# Allegro board avrusb500_1.brd
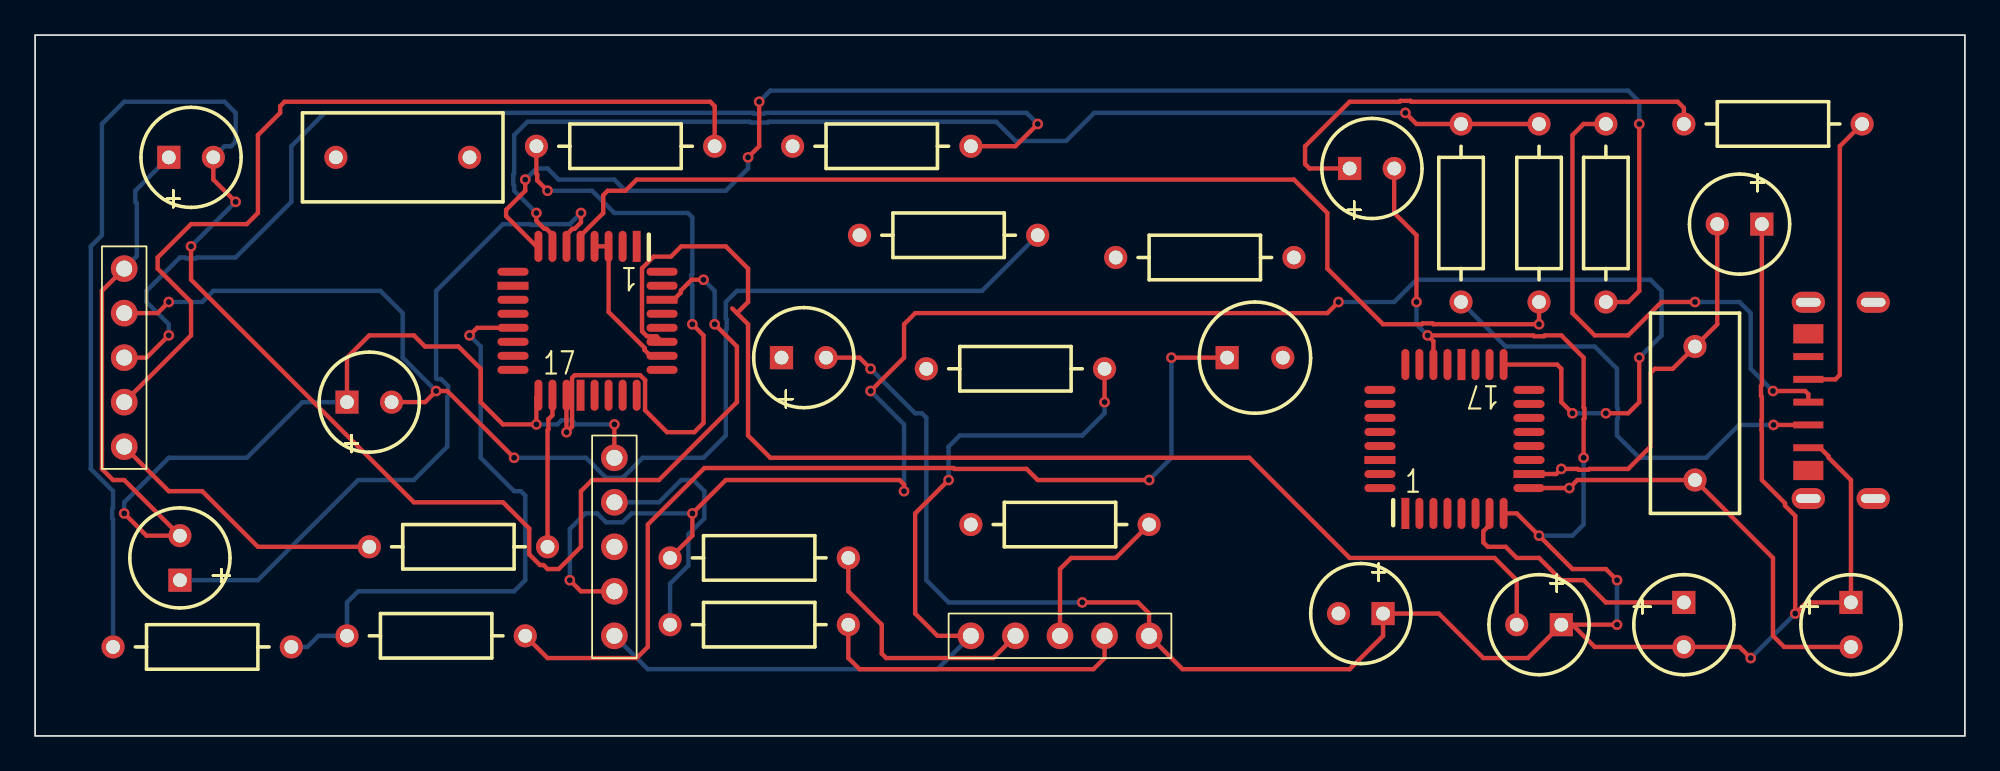
[diagram p0: board, top side]
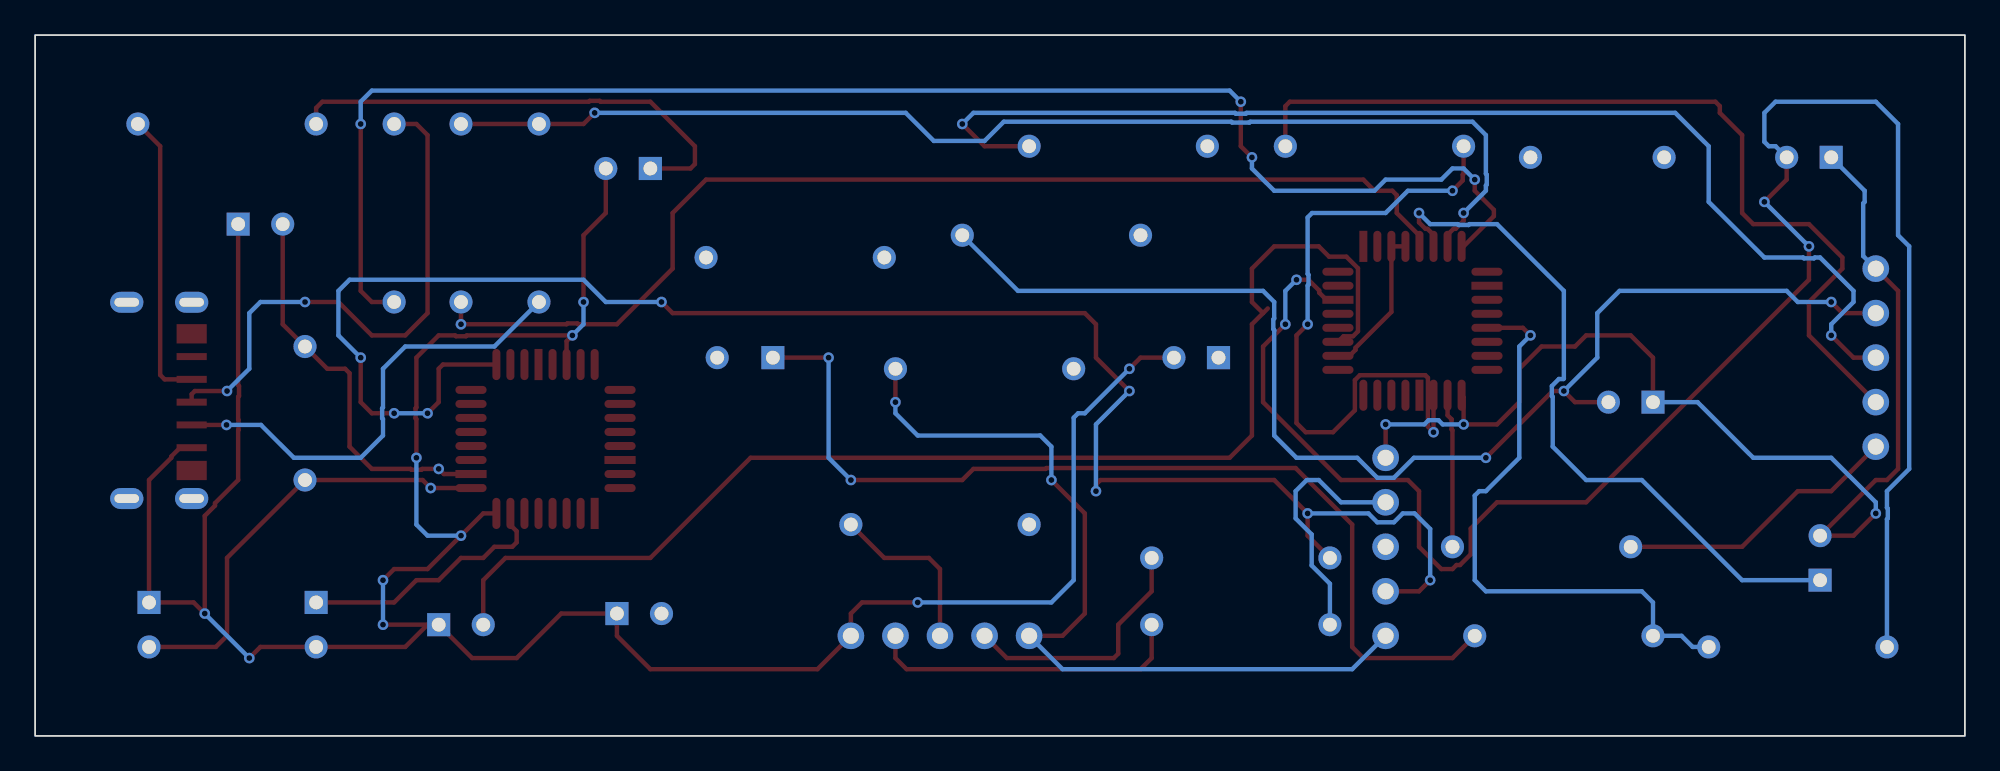
[diagram p1: board, bottom side, seen from below]

Outline 110 x 40 mm; copper layers: TOP, BOTTOM. Coordinates in mm from the lower left corner of the outline.
Outline path: rectangle 0,0 110,40

## Placement (name value [footprint] x y rotation side)
C1  47nF  [CPCYL1D225LS100031]  7.62 33.02 0 top
C2  27pF  [CPCYL1D225LS100031]  76.83 6.99 180 top
C3  27pF  [CPCYL1D225LS100031]  87 6.35 180 top
C4  47nF  [CPCYL1D225LS100031]  8.26 8.89 90 top
C5  100nF  [CPCYL1D225LS100031]  93.98 7.62 270 top
C6  1uF  [CPCYL1D225LS100031]  42.55 21.59 0 top
C7  100nF  [CPCYL1D225LS100031]  103.5 7.62 270 top
C8  100nF  [CPCYL1D225LS100031]  98.42 29.21 180 top
C9  100nF  [CPCYL1D225LS100031]  74.93 32.38 0 top
C10  22nF  [CPCYL1D225LS100031]  17.78 19.05 0 top
D1  LED  [CYLD250LS125031]  67.94 21.59 0 top
IC1  ATmega8  [QUAD80M32WG900]  78.11 12.7 0 top
J1  bbpg_Bitbang  [JUMPER5]  5.08 16.51 90 top
J2  USBA  [MY_USB]  104.78 19.05 90 top
J3  avrusb500_out  [JUMPER5]  53.34 5.71 0 top
J4  firmware_in  [JUMPER5]  33.02 5.71 90 top
R1  470  [AX400X100031]  4.45 5.08 0 top
R2  220  [AX400X100031]  46.99 28.57 0 top
R3  220  [AX400X100031]  43.18 33.66 0 top
R4  220  [AX400X100031]  28.57 33.66 0 top
R5  27  [AX400X100031]  89.53 34.92 270 top
R6  27  [AX400X100031]  81.28 24.77 90 top
R7  1.5k  [AX400X100031]  85.72 34.92 270 top
R8  2.2  [AX400X100031]  104.14 34.92 180 top
R9  10k  [AX400X100031]  61.59 27.3 0 top
R10  470  [AX400X100031]  27.94 5.71 180 top
R11  1k  [AX400X100031]  36.2 6.35 0 top
R12  220  [AX400X100031]  53.34 12.06 0 top
R13  1k  [AX400X100031]  36.2 10.16 0 top
R14  220  [AX400X100031]  29.21 10.79 180 top
R15  220  [AX400X100031]  50.8 20.95 0 top
U1  FT232BM  [QUAD80M32WG900]  34.29 27.94 180 top
Y1  3.6864Mhz  [RAD450X200LS300031]  94.61 22.23 270 top
Y2  6Mhz  [RAD450X200LS300031]  17.14 33.02 0 top

## Library data of the parts
C1-C5 C7-C10 = CAPACITOR NON-POL: alternate symbols: (SMDCAP)
C6 = CAPACITOR POL: alternate symbols: (SMDCAP)
D1 = LED
IC1 = ATmega8-DIL28_2
J1 J3 J4 = CON5: User Part Number: ***
J2 = CON4_7
R1-R15 = R: alternate symbols: (SMDRES)
U1 = FT232BM_2: alternate symbols: (JEDECMS026)
Y1 Y2 = ZTA

## Footprints (pads in the part's own frame, mm; a bottom-side part is the same pattern mirrored in y, then rotated)
AX400X100031
  round 1.321 hole 0.787: 1(0,0) 2(10.16,0)
CPCYL1D225LS100031
  rect 1.321x1.321 hole 0.787: 1(0,0)
  round 1.321 hole 0.787: 2(2.54,0)
CYLD250LS125031
  rect 1.321x1.321 hole 0.787: 1(0,0)
  round 1.321 hole 0.787: 2(3.175,0)
JUMPER5
  round 1.524 hole 0.914: 1(0,0) 2(2.54,0) 3(5.08,0) 4(7.62,0) 5(10.16,0)
MY_USB
  oval 1.2x1.9 hole 0.5x1.4: (-5.5,3.7) (-5.5,0) (5.7,3.7) (5.7,0)
  rect 1.1x1.72 smd: (-3.9,3.7) (3.9,3.7)
  rect 0.4x1.72 smd: 1(-2.6,3.7) 2(-1.3,3.7) 3(0,3.7) 4(1.3,3.7) 5(2.6,3.7)
QUAD80M32WG900
  rect 0.457x1.778 smd: 1(0,0) 20(3.2,8.496)
  oval 0.457x1.778 smd: 2(0.8,0) 3(1.6,0) 4(2.4,0) 5(3.2,0) 6(4,0) 7(4.801,0) 8(5.601,0) 17(5.601,8.496) 18(4.801,8.496) 19(4,8.496) 21(2.4,8.496) 22(1.6,8.496) 23(0.8,8.496) 24(0,8.496)
  oval 1.778x0.457 smd: 9(7.048,1.448) 11(7.048,3.048) 12(7.048,3.848) 13(7.048,4.648) 14(7.048,5.448) 15(7.048,6.248) 16(7.048,7.048) 25(-1.448,7.048) 26(-1.448,6.248) 27(-1.448,5.448) 28(-1.448,4.648) 29(-1.448,3.848) 31(-1.448,2.248) 32(-1.448,1.448)
  rect 1.778x0.457 smd: 10(7.048,2.248) 30(-1.448,3.048)
RAD450X200LS300031
  round 1.321 hole 0.787: 1(0,0) 2(7.62,0)

## Nets
+5V: J2.4 R8.1
GND: C1.1 C2.1 C3.1 C4.2 C5.2 C6.2 C7.1 C8.1 C9.2 C10.1 IC1.8(GND) IC1.22(AGND) J1.5 J2.1 J3.5 J4.5 U1.9(GND) U1.14(PWRCTL) U1.17(GND1) U1.29(AGND) U1.31(TEST)
VCC: C5.1 C6.1 C9.1 IC1.7(VCC) IC1.20(AVCC) R1.2 R8.2 R9.1 R10.2 U1.3(VCC) U1.4(RESET#) U1.13(VCC-IO) U1.26(VCC1)
BMISO: J1.3 R3.2
BMOSI: J1.2 R4.2
BRESET: J1.1 R14.2
BSCK: C10.2 J1.4 R2.2
D+: J2.2 R6.1
D-: J2.3 R5.1
F_MISO: IC1.18((MISO) PB4) J4.3 R12.1
F_MOSI: IC1.17((OC2/MOSI) PB3) J4.2 R13.1
F_SCK: IC1.19((SCK) PB5) J4.4 R11.1
MISO: J3.3 R12.2
MOSI: J3.2 R13.2
RESET: IC1.1(PC6 (R\E\S\E\T\)) J3.1 J4.1 R9.2 R15.2
RXD: IC1.2(PD0 (RXD)) U1.24(RXD)
SCK: J3.4 R11.2
TXD: IC1.3(PD1 (TXD)) U1.25(TXD)
N02483: R6.2 R7.1 U1.7(USBDP)
N02615: R5.2 U1.8(USBDM)
N03527: C4.1 U1.6(3V3OUT)
N06839: R2.1 U1.21(DTR#)
N06967: R3.1 U1.20(DSR#)
N07033: R4.1 U1.19(DCD#)
N07247: R14.1 U1.18(RI#)
N11951: R7.2 U1.5(RSTOUT#)
N15182: C7.2 IC1.9(PB6 (XT1/TOSC1)) Y1.2
N15289: C8.2 IC1.10(PB7 (XT2/TOSC2)) Y1.1
N19734: D1.2(CATHODE) IC1.23((ADC0) PC0)
N20572: D1.1(ANODE) R10.1
N22544: IC1.16((SS/OC1B) PB2) R15.1
N41098: C3.2 U1.27(XTIN) Y2.2
N41106: C2.2 U1.28(XTOUT) Y2.1
N49165: C1.2 R1.1 U1.30(AVCC)

Pads without a net: IC1 4 5 6 11 12 13 14 15 21 24 25 26 27 28 29 30 31 32; J2 5; U1 1 2 10 11 12 15 16 22 23 32

## Via types
v1: diameter 0.61, hole 0.33, TOP to BOTTOM, 51 vias

## Routing (per net, layer and track width the routed paths; a pad name or vN(x,y) marks a point on that pad's centre or on a via; arc(x,y) is an arc through that point)
+5V: length 16.7
  TOP w0.253: R8.1 102.87,33.66 102.87,20.6 102.62,20.35 J2.4
GND: length 228.5
  TOP w0.253: U1.17 28.57,19.33 v1(28.57,17.78) 26.67,17.78 25.4,19.05 25.4,20.95 24.13,22.23 22.23,22.23 21.59,22.86 19.05,22.86 17.78,21.59 C10.1 ; 87.63,6.35 88.9,5.08 C5.2 97.16,5.08 v1(97.79,4.45) ; 87.63,6.35 v1(90.17,6.35) ; 87.63,6.35 C3.1 85.09,4.45 82.55,4.45 80.01,6.99 C2.1 76.83,5.71 74.93,3.81 65.41,3.81 J3.5 63.5,6.99 62.87,7.62 v1(59.69,7.62) ; IC1.22 79.7,22.53 v1(79.38,22.86) 85.39,22.86 85.44,22.81 86.01,22.81 86.06,22.86 87,22.86 88.27,21.59 88.27,18.75 88.31,18.7 88.31,18.13 88.27,18.08 v1(88.27,15.88) ; C8.1 98.42,20.02 98.38,19.97 98.38,19.4 98.42,19.35 98.42,18.05 98.41,18.03 98.41,17.47 98.42,17.45 98.42,14.61 99.75,13.28 99.75,13.14 100.33,12.56 v1(100.33,6.99) 100.97,7.62 C7.1 ; v1(78.74,24.77) 78.74,28.57 77.47,29.84 C9.2 ; C6.2 46.99,21.59 v1(47.62,20.95) ; J4.5 v1(33.02,17.78) ; J1.5 3.81,25.4 3.81,15.24 4.45,14.61 5.08,14.61 C4.2 6.35,11.43 v1(5.08,12.7) ; IC1.8 84.45,12.7 v1(85.72,11.43) 87.63,9.53 89.53,9.53 v1(90.17,8.89)
  TOP w0.254: C7.1 103.5,14.61 102.23,15.88 102.23,15.95 101.74,16.45 J2.1
  BOTTOM w0.253: v1(78.74,24.77) 78.74,23.5 v1(79.38,22.86) ; v1(97.79,4.45) v1(100.33,6.99) ; v1(59.69,7.62) 52.07,7.62 50.8,8.89 50.8,18.16 50.55,18.41 50.16,18.41 v1(47.62,20.95) ; v1(28.57,17.78) 29.77,17.78 30.01,18.02 30.57,18.02 30.81,17.78 v1(33.02,17.78) ; C1.1 5.71,31.11 5.71,30.48 5.8,30.4 5.8,27.39 J1.5 ; v1(90.17,8.89) v1(90.17,6.35) ; v1(85.72,11.43) 87.63,11.43 88.27,12.06 v1(88.27,15.88) ; C10.1 15.24,19.05 12.06,15.88 7.62,15.88 5.08,13.34 v1(5.08,12.7)
VCC: length 84.9
  TOP w0.253: R8.2 93.98,35.84 93.62,36.2 78.44,36.2 78.39,36.24 77.82,36.24 77.77,36.2 74.93,36.2 72.39,33.66 72.39,32.64 72.64,32.38 C9.1 ; U1.26 35.08,21.69 34.74,22.03 34.74,22.15 32.69,24.2 U1.3 U1.4 ; IC1.7 82.91,12.04 82.55,11.68 82.55,11.05 82.8,10.79 83.82,10.79 84.45,10.16 85.72,10.16 87,8.89 88.27,8.89 89.53,7.62 C5.1 ; U1.13 25.2,23.29 v1(24.77,22.86)
  BOTTOM w0.253: R1.2 15.52,5.08 16.15,5.71 R10.2 17.78,7.62 18.41,8.26 27.3,8.26 27.94,8.89 27.94,13.72 27.69,13.97 27.3,13.97 25.4,15.88 25.4,22.23 v1(24.77,22.86)
BMISO: length 67.7
  TOP w0.253: v1(7.62,22.86) 6.35,21.59 J1.3 ; R3.2 55.88,33.66 v1(57.15,34.92)
  BOTTOM w0.253: v1(7.62,22.86) 7.62,23.5 6.35,24.77 6.35,25.4 8.26,27.3 8.56,27.3 8.61,27.26 9.17,27.26 9.22,27.3 11.43,27.3 14.61,30.48 14.61,33.66 16.51,35.56 40.94,35.56 40.99,35.51 41.56,35.51 41.61,35.56 56.52,35.56 v1(57.15,34.92)
BMOSI: length 51.3
  TOP w0.253: J1.2 8.89,22.86 8.89,24.77 6.99,26.67 6.99,27.3 8.89,29.21 12.06,29.21 12.7,29.84 12.7,34.29 13.97,35.56 13.97,35.94 14.22,36.2 38.48,36.2 38.73,35.94 R4.2
BRESET: length 16.3
  TOP w0.253: J1.1 7.62,13.97 9.53,13.97 12.7,10.79 R14.2
BSCK: length 71.5
  TOP w0.253: v1(7.62,24.77) 6.99,24.13 J1.4 ; v1(27.3,15.88) 23.5,19.68 v1(22.86,19.68) 22.23,19.05 C10.2
  BOTTOM w0.253: R2.2 53.98,25.4 40.01,25.4 39.37,24.77 39.37,23.83 39.42,23.78 39.42,23.21 39.37,23.16 39.37,17.14 38.1,15.88 34.63,15.88 33.49,14.73 32.55,14.73 31.41,15.88 v1(27.3,15.88) ; v1(7.62,24.77) 9.53,24.77 10.16,25.4 19.68,25.4 20.95,24.13 20.95,21.59 v1(22.86,19.68)
D+: length 26.5
  TOP w0.253: J2.2 v1(99.09,17.75)
  BOTTOM w0.253: R6.1 83.82,22.23 88.9,22.23 90.17,20.95 90.17,18.75 90.22,18.7 90.22,18.13 90.17,18.08 90.17,17.14 91.44,15.88 95.25,15.88 97.12,17.75 v1(99.09,17.75)
D-: length 31.6
  TOP w0.253: R5.1 88.27,34.92 87.63,34.29 87.63,24.13 88.9,22.86 90.81,22.86 92.71,24.77 v1(94.61,24.77) ; J2.3 101.08,19.5 100.89,19.68 v1(99.06,19.68)
  BOTTOM w0.253: v1(94.61,24.77) 97.16,24.77 97.79,24.13 97.79,20.95 v1(99.06,19.68)
F_MOSI: length 102.6
  TOP w0.253: v1(91.44,21.59) 91.44,19.05 90.81,18.41 v1(89.53,18.41) ; v1(47.62,19.68) 49.53,21.59 49.53,23.5 50.16,24.13 73.66,24.13 v1(74.3,24.77) ; v1(30.48,8.89) 31.11,8.26 33.02,8.26 ; IC1.17 86.75,21.2 87,20.95 87,19.05 v1(87.63,18.41) ; R13.1 37.47,11.43 v1(37.47,12.7) 39.37,14.61 49.28,14.61 49.53,14.35 v1(49.53,13.97)
  BOTTOM w0.253: v1(47.62,19.68) 49.53,17.78 v1(49.53,13.97) ; v1(74.3,24.77) 77.47,24.77 78.74,26.04 92.08,26.04 92.71,25.4 92.71,22.86 v1(91.44,21.59) ; v1(87.63,18.41) v1(89.53,18.41) ; v1(37.47,12.7) 34,12.7 33.49,12.19 32.55,12.19 32.04,12.7 31.37,12.7 30.48,11.81 v1(30.48,8.89)
F_SCK: length 14.3
  BOTTOM w0.253: R11.1 36.2,8.69 37.24,9.73 37.24,11.5 38.15,12.42 38.15,13.97 37.51,14.61 36.83,14.61 35.56,13.34 J4.4
MISO: length 9.9
  TOP w0.253: R12.2 61.59,10.16 59.05,10.16 58.42,9.53 J3.3
MOSI: length 14.5
  TOP w0.253: R13.2 46.35,8.26 48.26,6.35 48.26,4.7 48.51,4.45 54.61,4.45 J3.2
RESET: length 48.1
  TOP w0.253: v1(52.07,14.61) 50.16,12.7 50.16,6.99 51.44,5.71 J3.1 ; v1(60.96,19.05) R15.2
  BOTTOM w0.253: J4.1 34.92,3.81 51.44,3.81 J3.1 ; v1(60.96,19.05) 60.96,18.41 59.69,17.14 52.7,17.14 52.07,16.51 v1(52.07,14.61)
SCK: length 18.3
  TOP w0.253: J3.4 60.96,4.45 60.33,3.81 46.99,3.81 46.35,4.45 R11.2
N02483: length 67.5
  TOP w0.253: R7.1 R6.2 78.74,34.92 v1(78.11,35.56) ; U1.7 29.49,28.6 29.15,28.94 29.03,28.94 28.57,29.4 v1(28.57,29.84)
  BOTTOM w0.253: v1(28.57,29.84) 27.3,31.11 27.3,31.42 27.26,31.47 27.26,32.03 27.3,32.08 27.3,34.29 28.07,35.05 40.73,35.05 40.78,35 41.77,35 41.82,35.05 54.78,35.05 55.88,33.96 58.77,33.96 60.37,35.56 v1(78.11,35.56)
N02615: length 86.7
  TOP w0.253: v1(27.94,31.75) 27.94,31.11 26.85,30.02 26.85,29.67 28.57,27.94 ; v1(40.64,33.02) 41.27,33.66 v1(41.27,36.2) ; R5.2 90.81,24.77 91.44,25.4 v1(91.44,34.92)
  BOTTOM w0.253: v1(41.27,36.2) 41.91,36.83 90.81,36.83 91.44,36.2 v1(91.44,34.92) ; v1(27.94,31.75) 28.57,32.38 29.21,32.38 29.84,31.75 33.02,31.75 33.66,31.11 39.37,31.11 40.64,32.38 v1(40.64,33.02)
N03527: length 40.2
  TOP w0.253: U1.6 30.29,28.6 30.63,28.94 30.75,28.94 31.11,29.31 v1(31.11,29.84)
  BOTTOM w0.253: v1(31.11,29.84) 30.48,29.21 28.91,29.21 28.86,29.16 28.29,29.16 28.24,29.21 26.67,29.21 22.86,25.4 22.86,20.4 22.89,20.37 23.14,20.37 23.54,19.97 23.54,19.4 23.5,19.35 23.5,16.51 21.59,14.61 18.41,14.61 12.7,8.89 C4.1
N07033: length 39.2
  TOP w0.253: v1(37.47,23.5) 38.1,22.86 38.1,17.86 37.57,17.34 36.02,17.34 34.77,18.58 34.77,20.3 34.49,20.59 30.76,20.59 30.61,20.44 30.61,17.65 v1(30.29,17.34) U1.19 ; R4.1 28.57,32.08 28.62,32.03 28.62,31.7 v1(29.21,31.11)
  BOTTOM w0.253: v1(29.21,31.11) 31.75,31.11 33.02,29.84 37.21,29.84 37.47,29.59 37.47,26.37 37.42,26.32 37.42,25.75 37.47,25.7 v1(37.47,23.5)
N07247: length 8.8
  TOP w0.253: R14.1 29.21,17.45 29.26,17.5 29.26,18.06 29.26,18.07 29.49,18.3 U1.18
N11951: length 63.8
  TOP w0.253: U1.5 31.09,28.55 32.38,29.84 32.38,30.86 32.64,31.11 33.66,31.11 34.29,31.75 71.75,31.75 73.66,29.84 73.66,26.67 76.83,23.5 79.04,23.5 79.09,23.54 79.66,23.54 79.71,23.5 v1(85.72,23.5) R7.2
N15182: length 25.1
  TOP w0.253: Y1.2 87.91,14.61 v1(87.45,14.15) IC1.9
  TOP w0.254: Y1.2 99.06,10.16 99.06,5.71 99.69,5.08 C7.2
N15289: length 22.5
  TOP w0.253: C8.2 95.89,23.5 Y1.1 93.34,20.95 92.33,20.95 92.08,20.7 92.08,16.51 90.81,15.24 88.6,15.24 88.55,15.19 87.98,15.19 87.93,15.24 v1(87,15.24) 86.7,14.95 IC1.10
N20572: length 55.6
  TOP w0.253: R10.1 29.21,4.45 34.29,4.45 34.92,5.08 34.92,12.06 38.15,15.29 52.35,15.29 52.4,15.24 56.52,15.24 57.15,14.61 v1(63.5,14.61) ; v1(64.77,21.59) D1.1
  BOTTOM w0.253: v1(64.77,21.59) 64.77,15.88 v1(63.5,14.61)
N41098: length 72.3
  TOP w0.253: C3.2 84.45,8.89 83.19,10.16 74.93,10.16 69.22,15.88 41.91,15.88 40.64,17.14 40.64,23.5 40.01,24.13 ; 40.01,24.13 39.74,24.4 ; 40.01,24.13 40.64,24.76 40.64,26.67 39.37,27.94 36.83,27.94 36.24,27.35 35.26,27.35 34.6,26.69 34.6,23.09 34.88,22.81 35.42,22.81 U1.27
N49165: length 106.2
  TOP w0.253: v1(8.89,27.94) 8.89,26.04 21.59,13.34 26.67,13.34 28.17,11.84 28.17,10.36 28.78,9.75 28.98,9.75 29.21,9.53 29.84,9.53 31.11,10.79 31.11,13.97 31.75,14.61 35.56,14.61 40.01,19.05 40.01,22.23 v1(38.73,23.5) ; v1(38.1,26.04) 37.42,26.04 36.81,25.42 36.81,25.3 36.4,24.89 U1.30 ; C1.2 10.16,31.75 v1(11.43,30.48)
  BOTTOM w0.253: C1.2 10.79,33.66 11.18,33.66 11.43,33.91 11.43,35.56 10.79,36.2 5.08,36.2 3.81,34.92 3.81,28.57 3.17,27.94 3.17,15.24 4.45,13.97 4.45,13.03 4.4,12.98 4.4,12.42 4.45,12.37 R1.1 ; v1(11.43,30.48) v1(8.89,27.94) ; v1(38.1,26.04) 38.73,25.4 v1(38.73,23.5)
